# EAGLE board RC_MUX (EAGLE 6.4)
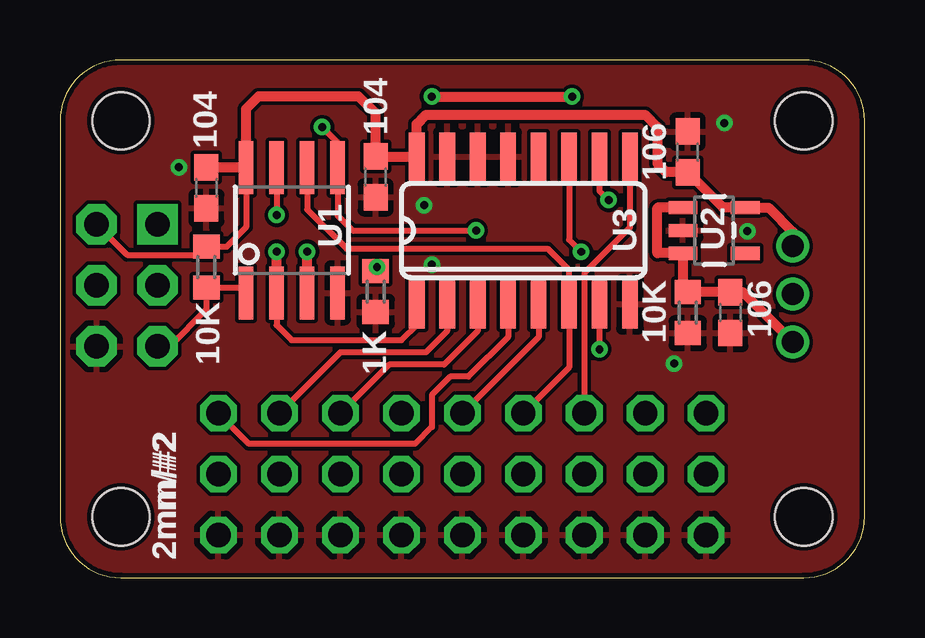
[diagram p0: board, top side]
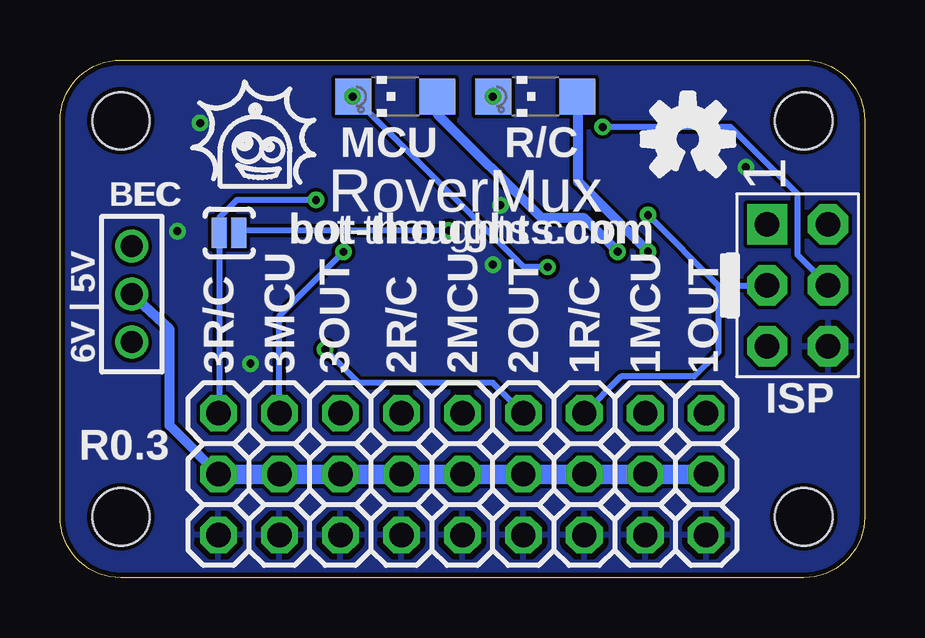
[diagram p1: board, bottom side, seen from below]

Size 33.53 x 21.59 mm. Coordinates in mm from the lower left corner, seen from the top.
Outline: 30.99,21.59 2.54,21.59 arc90 0,19.05 0,2.54 arc90 2.54,0 30.99,0 arc90 33.53,2.54 33.53,19.05 arc90 30.99,21.59
Copper layers (1*16): Top 0.0356mm / dielectric 1.5011mm / Bottom 0.0356mm
Design rules "LaenPCBOrder *": minimum track width 6mil, minimum drill 13mil, track to track 6mil, track to pad 6mil, pad to pad 6mil, via to via 6mil, smd to smd 6mil, copper to edge 8mil, drill to drill 6mil, minimum pad ring 7mil, minimum via ring 7mil, stop-mask expansion 4mil, vias tented up to drill 20mil, thermal gap 10mil
Holes 2.39 mm at 30.99,2.54 30.99,19.05 2.54,2.54 2.54,19.05

## Footprints (pad centres in the part's own frame; a part is rotated, then mirrored left to right if it is on the bottom)
C0603 = smd 1.1 x 1: 1 -0.85,0; 2 0.85,0
CON6P2R = drill 1.016 pad 1.676 square: 1 -2.54,-1.27 | drill 1.016 pad 1.676 octagon: 2 -2.54,1.27; 3 0,-1.27; 4 0,1.27; 5 2.54,-1.27; 6 2.54,1.27
1X03M = drill 0.914: 1 -2,0; 2 0,0; 3 2,0
1X03-S = drill 1.016 octagon: 1 -2.54,0; 2 0,0; 3 2.54,0
CHIPLED_1206 = smd 1.5 x 1.5: A 0,-1.75; C 0,1.75
R0603 = smd 1 x 1.1: 1 -0.85,0; 2 0.85,0
SJ_2S-NOTRACE = smd 0.635 x 1.27: 1 -0.401,0; 2 0.413,0
SO08 = smd 0.61 x 2.21: 1 -1.905,-2.616; 2 -0.635,-2.616; 3 0.635,-2.616; 4 1.905,-2.616; 5 1.905,2.616; 6 0.635,2.616; 7 -0.635,2.616; 8 -1.905,2.616
SOT23-5 = smd 0.55 x 1.2: 1 -0.95,-1.3; 2 0,-1.3; 3 0.95,-1.3; 4 0.95,1.3; 5 -0.95,1.3
SO16 = smd 0.66 x 2.032: 1 -4.445,-3.073; 2 -3.175,-3.073; 3 -1.905,-3.073; 4 -0.635,-3.073; 5 0.635,-3.073; 6 1.905,-3.073; 7 3.175,-3.073; 8 4.445,-3.073; 9 4.445,3.073; 10 3.175,3.073; 11 1.905,3.073; 12 0.635,3.073; 13 -0.635,3.073; 14 -1.905,3.073; 15 -3.175,3.073; 16 -4.445,3.073

## Placement (x,y rotation side)
C2  104  [C0603]  6.1,16.26 270 top
C3  106  [C0603]  27.93,11.05 270 top
C4  104  [C0603]  13.15,16.71 270 top
C5  106  [C0603]  26.15,17.75 90 top
J1  ISP  [CON6P2R]  2.79,12.19 270 bottom
JP1  PWRSEL  [1X03M]  30.54,11.82 270 bottom
JP11  1MCU  [1X03-S]  9.14,4.32 270 bottom
JP12  2MCU  [1X03-S]  16.76,4.32 270 bottom
JP13  3MCU  [1X03-S]  24.38,4.32 270 bottom
JP21  1R/C  [1X03-S]  11.68,4.32 270 bottom
JP22  2R/C  [1X03-S]  19.3,4.32 270 bottom
JP23  3R/C  [1X03-S]  26.92,4.32 270 bottom
JP31  1OUT  [1X03-S]  6.6,4.32 270 bottom
JP32  2OUT  [1X03-S]  14.22,4.32 270 bottom
JP33  3OUT  [1X03-S]  21.84,4.32 270 bottom
LED1  MCU  [CHIPLED_1206]  19.56,20.07 90 bottom
LED2  R/C  [CHIPLED_1206]  13.72,20.07 90 bottom
R1  10K  [R0603]  6.1,12.95 90 top
R2  1K  [R0603]  13.15,11.93 270 top
R4  10K  [R0603]  26.16,11.05 90 top
SJ1  CH3  [SJ_2S-NOTRACE]  26.48,14.37 180 bottom
U1  TINY13  [SO08]  9.66,14.49 0 top
U2  MCP1824T  [SOT23-5]  27.26,14.48 270 top
U3  74LS157D  [SO16]  19.3,14.48 0 top

## Library data of the parts
C2 C4 = rcl; PARTNO: C1608X7R1E104K080AA
C3 C5 = rcl; PARTNO: CL10A106MP8NNNC
J1 = bt_avr
JP1 JP11-JP13 JP21-JP23 JP31-JP33 = pinhead-2
LED1 = led; PARTNO: LH N974-KN-1
LED2 = led; PARTNO: LG N971-KN-1
R1 R4 = rcl; PARTNO: 1622829-1
R2 = rcl; PARTNO: RC0603JR-07330RL
SJ1 = SparkFun
U1 = avr-7; PARTNO: ATTINY13A-SSH
U2 = mes_regulators; PARTNO: MCP1824T-5002E/OT
U3 = 74xx-us; PARTNO: 74HCT157D,652

## Nets
!RESET: J1.5 R1.1 U1.1
+5V: C2.1 C4.1 C5.1 J1.2 JP1.1 R1.2 U1.8 U2.5 U3.16
+7V: JP1.2 JP11.2 JP12.2 JP13.2 JP21.2 JP22.2 JP23.2 JP31.2 JP32.2 JP33.2
A: LED1.A U1.3
B: LED2.A U1.2 U3.1
CH1MCU: JP11.1 U3.2
CH1OUT: JP31.1 U3.4
CH1RX: J1.3 JP21.1 U1.7 U3.3
CH2MCU: JP12.1 U3.5
CH2OUT: JP32.1 U3.7
CH2RX: JP22.1 U1.6 U3.6
CH3MCU: JP13.1 U3.11
CH3OUT: JP33.1 U3.9
CH3RX: JP23.1 SJ1.2 U3.10
GND: C2.2 C3.2 C4.2 C5.2 J1.6 JP11.3 JP12.3 JP13.3 JP21.3 JP22.3 JP23.3 JP31.3 JP32.3 JP33.3 R2.2 R4.1 U1.4 U2.2 U3.8 U3.13 U3.14 U3.15
MISO: J1.1
MOSI: J1.4 SJ1.1 U1.5
N$3: LED1.C LED2.C R2.1
REGIN: C3.1 JP1.3 R4.2 U2.1 U2.3

## Tracks (layer width: path | path; a pad name or v marks a point on that pad's centre or on a via)
!RESET
  Top 0.254: U1.1 7.48,12.1 R1.1 6.1,11.18 4.57,9.65 J1.5
+5V
  Top 0.254: J1.2 2.79,13.46 5.68,13.46 R1.2 6.95,13.8 7.76,14.62 U1.8 | C2.1
  Top 0.406: C2.1 U1.8 7.76,19.56 8.26,20.07 12.45,20.07 13.15,19.36 C4.1 14.85,17.56 U3.16 14.86,18.92 15.24,19.3 24.38,19.3 24.89,18.8 24.89,17.27 25.26,16.9 C5.1 27.63,15.43 U2.5 29.53,15.43 30.54,14.42 JP1.1
+7V
  Bottom 0.406: JP23.2 28.96,6.35 28.96,10.37 JP1.2
  Bottom 0.813: JP23.2 JP13.2 JP33.2 JP22.2 JP12.2 JP32.2 JP21.2 JP11.2 JP31.2
A  (via drill 0.33)
  Top 0.406: U1.3 v10.3,13.6
  Bottom 0.406: LED1.A 17.81,19.33 13.46,14.99 11.68,14.99 v10.3,13.6
B  (via drill 0.33)
  Top 0.254: U1.2 9.03,10.53 9.65,9.91 14.22,9.91 14.86,10.54 U3.1
  Top 0.406: U1.2 v9.03,13.6
  Bottom 0.406: v9.03,13.6 11.94,16.51 11.94,20.04 LED2.A
CH1MCU
  Top 0.254: U3.2 16.13,10.29 15.24,9.4 11.68,9.4 JP11.1
CH1OUT
  Top 0.254: U3.4 18.67,10.03 17.02,8.38 16.26,8.38 15.49,7.62 15.49,6.29 14.79,5.59 7.87,5.59 JP31.1
CH1RX  (via drill 0.33)
  Top 0.254: U3.3 17.4,10.29 16,8.89 13.72,8.89 JP21.1 | U1.7 v9.03,15.12
  Bottom 0.254: v9.03,15.12 6.1,12.19 | 6.1,12.19 J1.3 | 6.1,12.19 6.1,9.4 7.11,8.38 10.16,8.38 JP21.1
CH2MCU
  Top 0.254: U3.5 19.94,10.03 JP12.1
CH2OUT  (via drill 0.33)
  Top 0.254: U3.7 v22.48,9.53
  Bottom 0.254: JP32.1 15.49,8.13 21.08,8.13 v22.48,9.53
CH2RX
  Top 0.254: JP22.1 21.21,8.76 U3.6 21.21,12.83 20.32,13.72 11.94,13.72 10.3,15.36 U1.6
CH3MCU  (via drill 0.33)
  Top 0.254: U3.11 21.21,14.1 v21.72,13.59
  Bottom 0.254: JP13.1 24.38,10.92 v21.72,13.59
CH3OUT
  Top 0.254: U3.9 23.75,14.61 21.84,12.7 JP33.1
CH3RX  (via drill 0.33)
  Top 0.254: U3.10 22.48,16.13 v22.86,15.75
  Bottom 0.254: v22.86,15.75 26.16,15.75 26.89,15.02 SJ1.2 26.89,6.89 JP23.1
GND  (via drill 0.33)
  other vias: 15.18,15.53 15.49,13.06 28.64,14.45 27.69,18.96 25.59,8.93 4.95,17.12
  pour Top: 2.54,21.59 30.99,21.59 arc-90 33.53,19.05 33.53,2.54 arc-90 30.99,0 2.54,0 arc-90 0,2.54 0,19.05 arc-90
  pour Bottom: 2.54,21.59 30.99,21.59 arc-90 33.53,19.05 33.53,2.54 arc-90 30.99,0 2.54,0 arc-90 0,2.54 0,19.05 arc-90
MOSI  (via drill 0.33)
  Top 0.254: v17.34,14.48 12.19,14.48 11.57,15.1 U1.5 11.57,18.15 v10.92,18.8
  Bottom 0.254: v17.34,14.48 25.97,14.48 SJ1.1 | J1.4 2.79,13.46 2.79,16 5.59,18.8 v10.92,18.8
N$3  (via drill 0.33)
  Top 0.254: R2.1 13.03,12.78 v13.21,12.95
  Top 0.406: v15.49,20.07 v21.34,20.07
  Bottom 0.254: v13.21,12.95 14.2,12.95 LED1.C
  Bottom 0.406: v21.34,20.07 LED1.C | LED2.C v15.49,20.07
REGIN
  Top 0.406: U2.1 24.89,15.43 24.89,13.53 U2.3 25.96,11.85 R4.2 C3.1 28.46,11.9 JP1.3

## Text on the board
tPlace: 2mm/#2
bPlace: BEC | 6V | 5V
bNames: 1 | RoverMux | bot-thoughts.com | R0.3
tsilk: 104 | 104 | 106 | U1 | U3 | U2 | 10K | 106 | 1K | 10K | 2mm/#2
bsilk: R/C | MCU | 1 | RoverMux | BEC | bot-thoughts.com | 1OUT | 1MCU | 1R/C | 2OUT | 2MCU | 2R/C | 3OUT | 3MCU | 3R/C | 6V | 5V | ISP | R0.3